# EAGLE board Task _ two way traffic control (EAGLE 9.7.0)
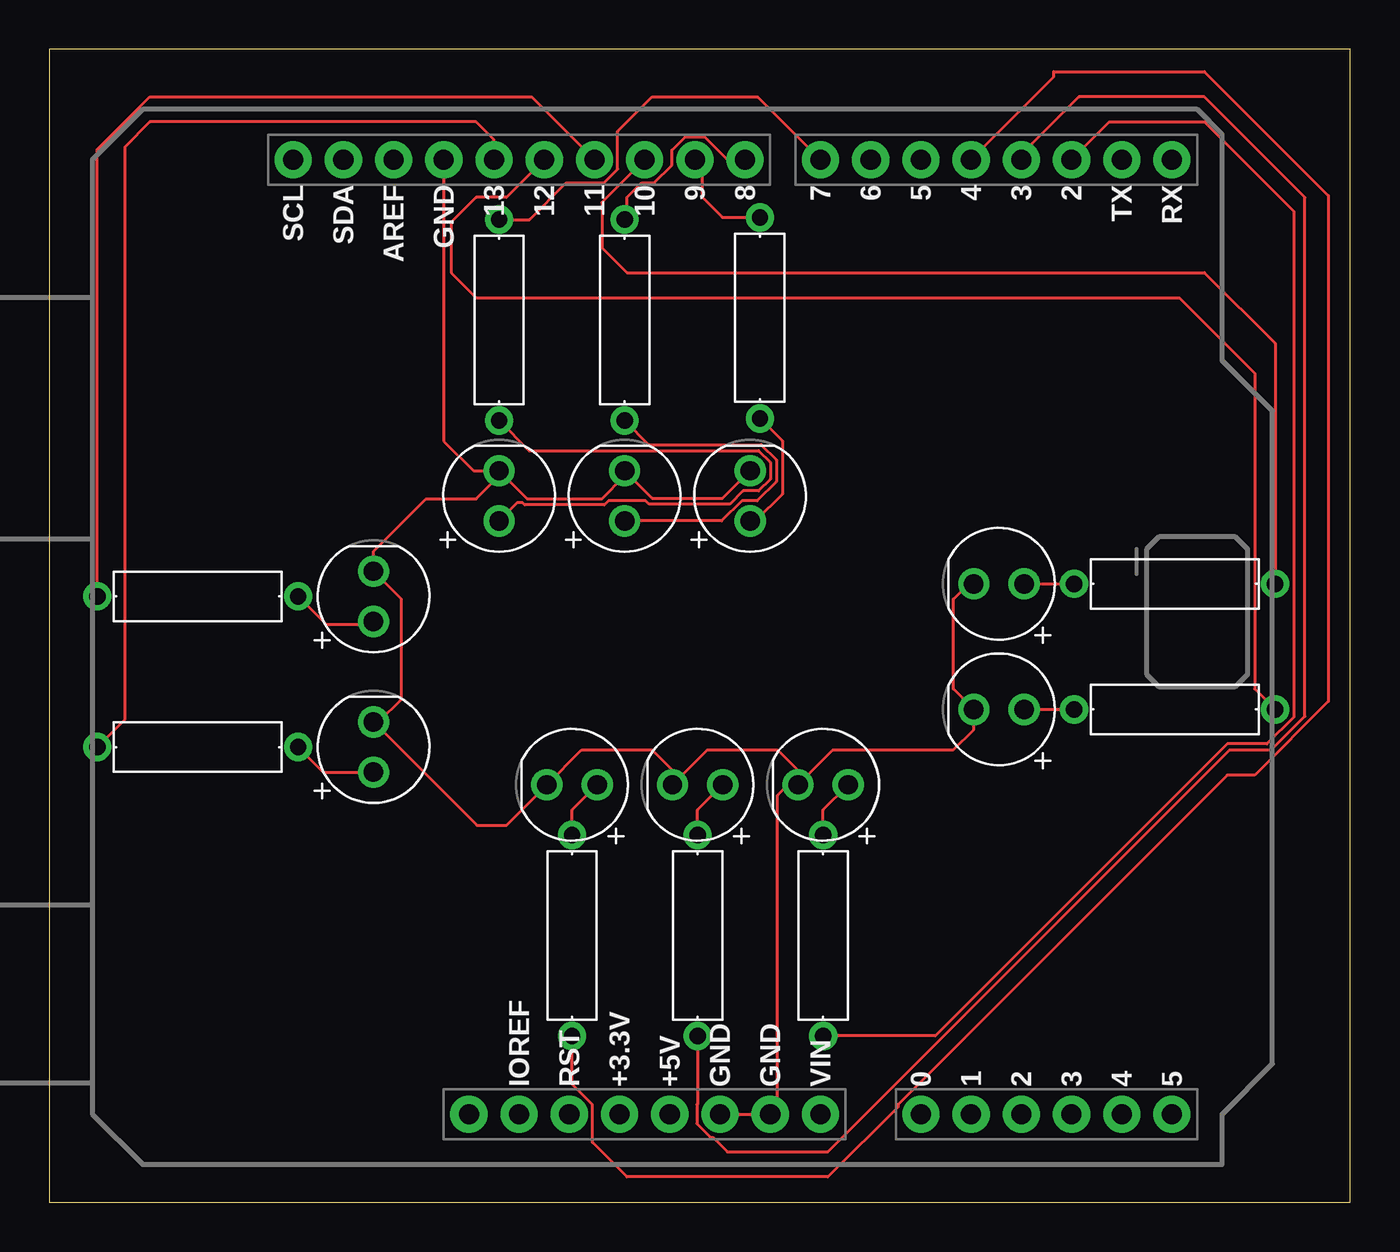
[diagram p0: board, top side]

Size 65.78 x 58.28 mm. Coordinates in mm from the lower left corner, seen from the top.
Outline: 0,0 65.78,0 65.78,58.28 0,58.28 0,0
Copper layers (1*16): Top 0.035mm / dielectric 1.5mm / Bottom 0.035mm
Design rules "default": minimum track width 6mil, minimum drill 0.35mm, track to track 6mil, track to pad 6mil, pad to pad 6mil, via to via 6mil, smd to smd 6mil, copper to edge 40mil, drill to drill 6mil, minimum pad ring 10mil, minimum via ring 8mil, stop-mask expansion 4mil, vias tented up to drill 0mil, thermal gap 10mil

## Footprints (pad centres in the part's own frame; a part is rotated, then mirrored left to right if it is on the bottom)
LEDRD254W60D565H860B = drill 0.981 pad 1.581: 1 -1.27,0; 2 1.27,0
LEDRD254W60D565H860B_Y = drill 0.981 pad 1.581: 1 -1.27,0; 2 1.27,0
LEDRD254W60D565H860B_G = drill 0.981 pad 1.581: 1 -1.27,0; 2 1.27,0
LEDRD254W60D565H860B_B = drill 0.981 pad 1.581: 1 -1.27,0; 2 1.27,0
RESAD1016W63L850D250B = drill 0.83 pad 1.43: 1 -5.08,0; 2 5.08,0
ARDUINO-UNO-R3-SHIELD = drill 1.016 pad 1.88: 3.3V 24.13,-2.54; 5V 24.13,0; A0 24.13,12.7; A1 24.13,15.24; A2 24.13,17.78; A3 24.13,20.32; A4 24.13,22.86; A5 24.13,25.4; AREF -24.13,-13.97; D2 -24.13,20.32; D3 -24.13,17.78; D4 -24.13,15.24; D5 -24.13,12.7; D6 -24.13,10.16; D7 -24.13,7.62; D8 -24.13,3.81; D9 -24.13,1.27; D10 -24.13,-1.27; D11 -24.13,-3.81; D12 -24.13,-6.35; D13 -24.13,-8.89; GND@0 24.13,2.54; GND@1 24.13,5.08; GND@2 -24.13,-11.43; IOREF 24.13,-7.62; NC 24.13,-10.16; RES 24.13,-5.08; RX -24.13,25.4; SCL -24.13,-19.05; SDA -24.13,-16.51; TX -24.13,22.86; VIN 24.13,7.62

## Placement (x,y rotation side)
D1  RED  [LEDRD254W60D565H860B]  35.44,35.71 90 top
D2  YELLOW  [LEDRD254W60D565H860B_Y]  29.09,35.71 90 top
D3  GREEN  [LEDRD254W60D565H860B_G]  22.74,35.71 90 top
D4  RED  [LEDRD254W60D565H860B]  26.43,21.1 180 top
D5  YELLOW  [LEDRD254W60D565H860B_Y]  32.78,21.1 180 top
D6  GREEN  [LEDRD254W60D565H860B_G]  39.13,21.1 180 top
D7  BLUE  [LEDRD254W60D565H860B_B]  16.39,30.63 90 top
D8  BLUE  [LEDRD254W60D565H860B_B]  48.02,31.26 180 top
D9  RED  [LEDRD254W60D565H860B]  48.02,24.91 180 top
D10  RED  [LEDRD254W60D565H860B]  16.39,23.01 90 top
R1  220  [RESAD1016W63L850D250B]  32.78,13.48 90 top
R2  220  [RESAD1016W63L850D250B]  26.43,13.48 90 top
R3  220  [RESAD1016W63L850D250B]  39.13,13.48 90 top
R4  220  [RESAD1016W63L850D250B]  56.91,31.26 180 top
R5  220  [RESAD1016W63L850D250B]  56.91,24.91 180 top
R6  220  [RESAD1016W63L850D250B]  22.74,44.6 90 top
R8  220  [RESAD1016W63L850D250B]  29.09,44.6 90 top
R9  220  [RESAD1016W63L850D250B]  35.94,44.7 90 top
R10  220  [RESAD1016W63L850D250B]  7.5,30.63 180 top
R11  220  [RESAD1016W63L850D250B]  7.5,23.01 180 top
U1  ARDUINO-UNO-R3-SHIELD  [ARDUINO-UNO-R3-SHIELD]  31.37,28.57 270 top

## Library data of the parts
D1 D4 D9 D10 = Tinkercad; CATEGORY: Opto-Electronic; SUB-CATEGORY: LED; VALUE: LED_RED
D2 D5 = Tinkercad; CATEGORY: Opto-Electronic; SUB-CATEGORY: LED; VALUE: LED_YELLOW
D3 D6 = Tinkercad; CATEGORY: Opto-Electronic; SUB-CATEGORY: LED; VALUE: LED_GREEN
D7 D8 = Tinkercad; CATEGORY: Opto-Electronic; SUB-CATEGORY: LED; VALUE: LED_BLUE
R1-R6 R8-R11 U1 = Tinkercad

## Nets
D1_A: D1.1 R9.1
D2_A: D2.1 R8.1
D3_A: D3.1 R6.1
D4_A: D4.1 R2.2
D5_A: D5.1 R1.2
D6_A: D6.1 R3.2
D7_A: D7.1 R10.1
D8_A: D8.1 R4.2
D9_A: D9.1 R5.2
D10_A: D10.1 R11.1
U1_D2: R3.1 U1.D2
U1_D3: R1.1 U1.D3
U1_D4: R2.1 U1.D4
U1_D7: R6.2 U1.D7
U1_D8: R8.2 U1.D8
U1_D9: R9.2 U1.D9
U1_D10: R4.1 U1.D10
U1_D11: R10.2 U1.D11
U1_D12: R5.1 U1.D12
U1_D13: R11.2 U1.D13
U1_GND: D1.2 D2.2 D3.2 D4.2 D5.2 D6.2 D7.2 D8.2 D9.2 D10.2 U1.GND@0 U1.GND@1 U1.GND@2

## Tracks (layer width: path | path; a pad name or v marks a point on that pad's centre or on a via)
D1_A
  Top 0.152: R9.1 37.07,38.49 37.07,35.8 35.71,34.44 D1.1
D2_A
  Top 0.152: R8.1 30.31,38.3 35.99,38.3 36.77,37.52 36.77,36.43 35.79,35.45 35.02,35.45 34,34.44 D2.1
D3_A
  Top 0.152: D3.1 23.66,35.36 23.93,35.36 24.03,35.25 28.07,35.25 28.27,35.45 30.15,35.45 30.33,35.28 34.41,35.28 35.09,35.96 35.86,35.96 36.46,36.55 36.46,37.4 35.86,37.99 24.26,37.99 R6.1
D4_A
  Top 0.152: R2.2 26.43,19.83 D4.1
D5_A
  Top 0.152: R1.2 32.78,19.83 D5.1
D6_A
  Top 0.152: R3.2 39.13,19.83 D6.1
D7_A
  Top 0.152: R10.1 14,29.21 16.25,29.21 D7.1
D8_A
  Top 0.152: D8.1 R4.2
D9_A
  Top 0.152: D9.1 R5.2
D10_A
  Top 0.152: R11.1 13.85,21.74 D10.1
U1_D2
  Top 0.152: U1.D2 53.6,54.61 58.42,54.61 62.94,50.09 62.94,24.52 61.58,23.16 59.56,23.16 44.8,8.4 R3.1
U1_D3
  Top 0.152: R1.1 32.78,4.96 32.75,4.93 32.75,3.96 33.43,3.28 33.55,3.28 34.29,2.54 39.37,2.54 59.69,22.86 61.8,22.86 63.5,24.56 63.5,50.8 58.42,55.88 52.07,55.88 49.16,52.96 U1.D3
U1_D4
  Top 0.152: U1.D4 50.8,56.89 50.8,57.15 58.42,57.15 64.69,50.88 64.69,25.32 60.96,21.59 59.57,21.59 42.91,4.93 42.91,4.81 39.37,1.27 29.21,1.27 27.46,3.02 27.46,4.93 26.43,5.96 R2.1
U1_D7
  Top 0.152: R6.2 24.28,49.68 26.14,51.54 28.05,51.54 28.73,52.22 28.73,54.13 30.48,55.88 35.82,55.88 U1.D7
U1_D8
  Top 0.152: R8.2 29.21,49.79 29.21,50.8 29.95,51.54 30.59,51.54 31.48,52.42 31.48,53.19 32.16,53.87 33.13,53.87 34.3,52.7 U1.D8
U1_D9
  Top 0.152: U1.D9 33.02,52.33 33.02,50.8 34.04,49.78 R9.2
U1_D10
  Top 0.152: U1.D10 27.94,50.54 27.94,48.26 29.21,46.99 58.42,46.99 61.99,43.42 R4.1
U1_D11
  Top 0.152: R10.2 2.42,53.22 5.08,55.88 24.39,55.88 U1.D11
U1_D12
  Top 0.152: U1.D12 23.12,50.8 21.59,50.8 20.32,49.53 20.32,46.99 21.59,45.72 57.15,45.72 60.96,41.91 60.96,25.94 R5.1
U1_D13
  Top 0.152: U1.D13 22.48,53.71 21.59,54.61 5.08,54.61 3.81,53.34 3.81,24.39 R11.2
U1_GND
  Top 0.152: U1.GND@2 19.94,38.47 21.44,36.98 D3.2 | 37.86,21.59 37.86,21.83 36.83,22.86 33.27,22.86 D5.2 31.51,21.83 30.48,22.86 26.92,22.86 D4.2 23.11,19.05 21.62,19.05 D10.2 16.66,24.28 17.78,25.4 17.78,30.51 D7.2 16.39,32.9 19.05,35.56 21.59,35.56 22.74,36.71 D3.2 | 37.86,21.59 D6.2 39.62,22.86 45.72,22.86 46.75,23.89 D9.2 45.72,25.94 45.72,30.48 46.5,31.26 D8.2 | D3.2 24.16,35.56 27.94,35.56 29.09,36.71 D2.2 30.48,35.59 34.05,35.59 D1.2 | U1.GND@0 U1.GND@1 36.83,4.82 36.83,20.56 37.86,21.59